# Altium PCB 拼版-max7219-tm1638-MOS板mp3.PcbDoc (part 2 of 2)
Units mil, origin at the board's own origin, x right, y up, seen from the top; angles counter-clockwise.
Board outline 3937.01 x 3937.01 mil, 2 copper layers (Top Layer, Bottom Layer); 103 components, 91 nets, 367 pads, 134 vias.
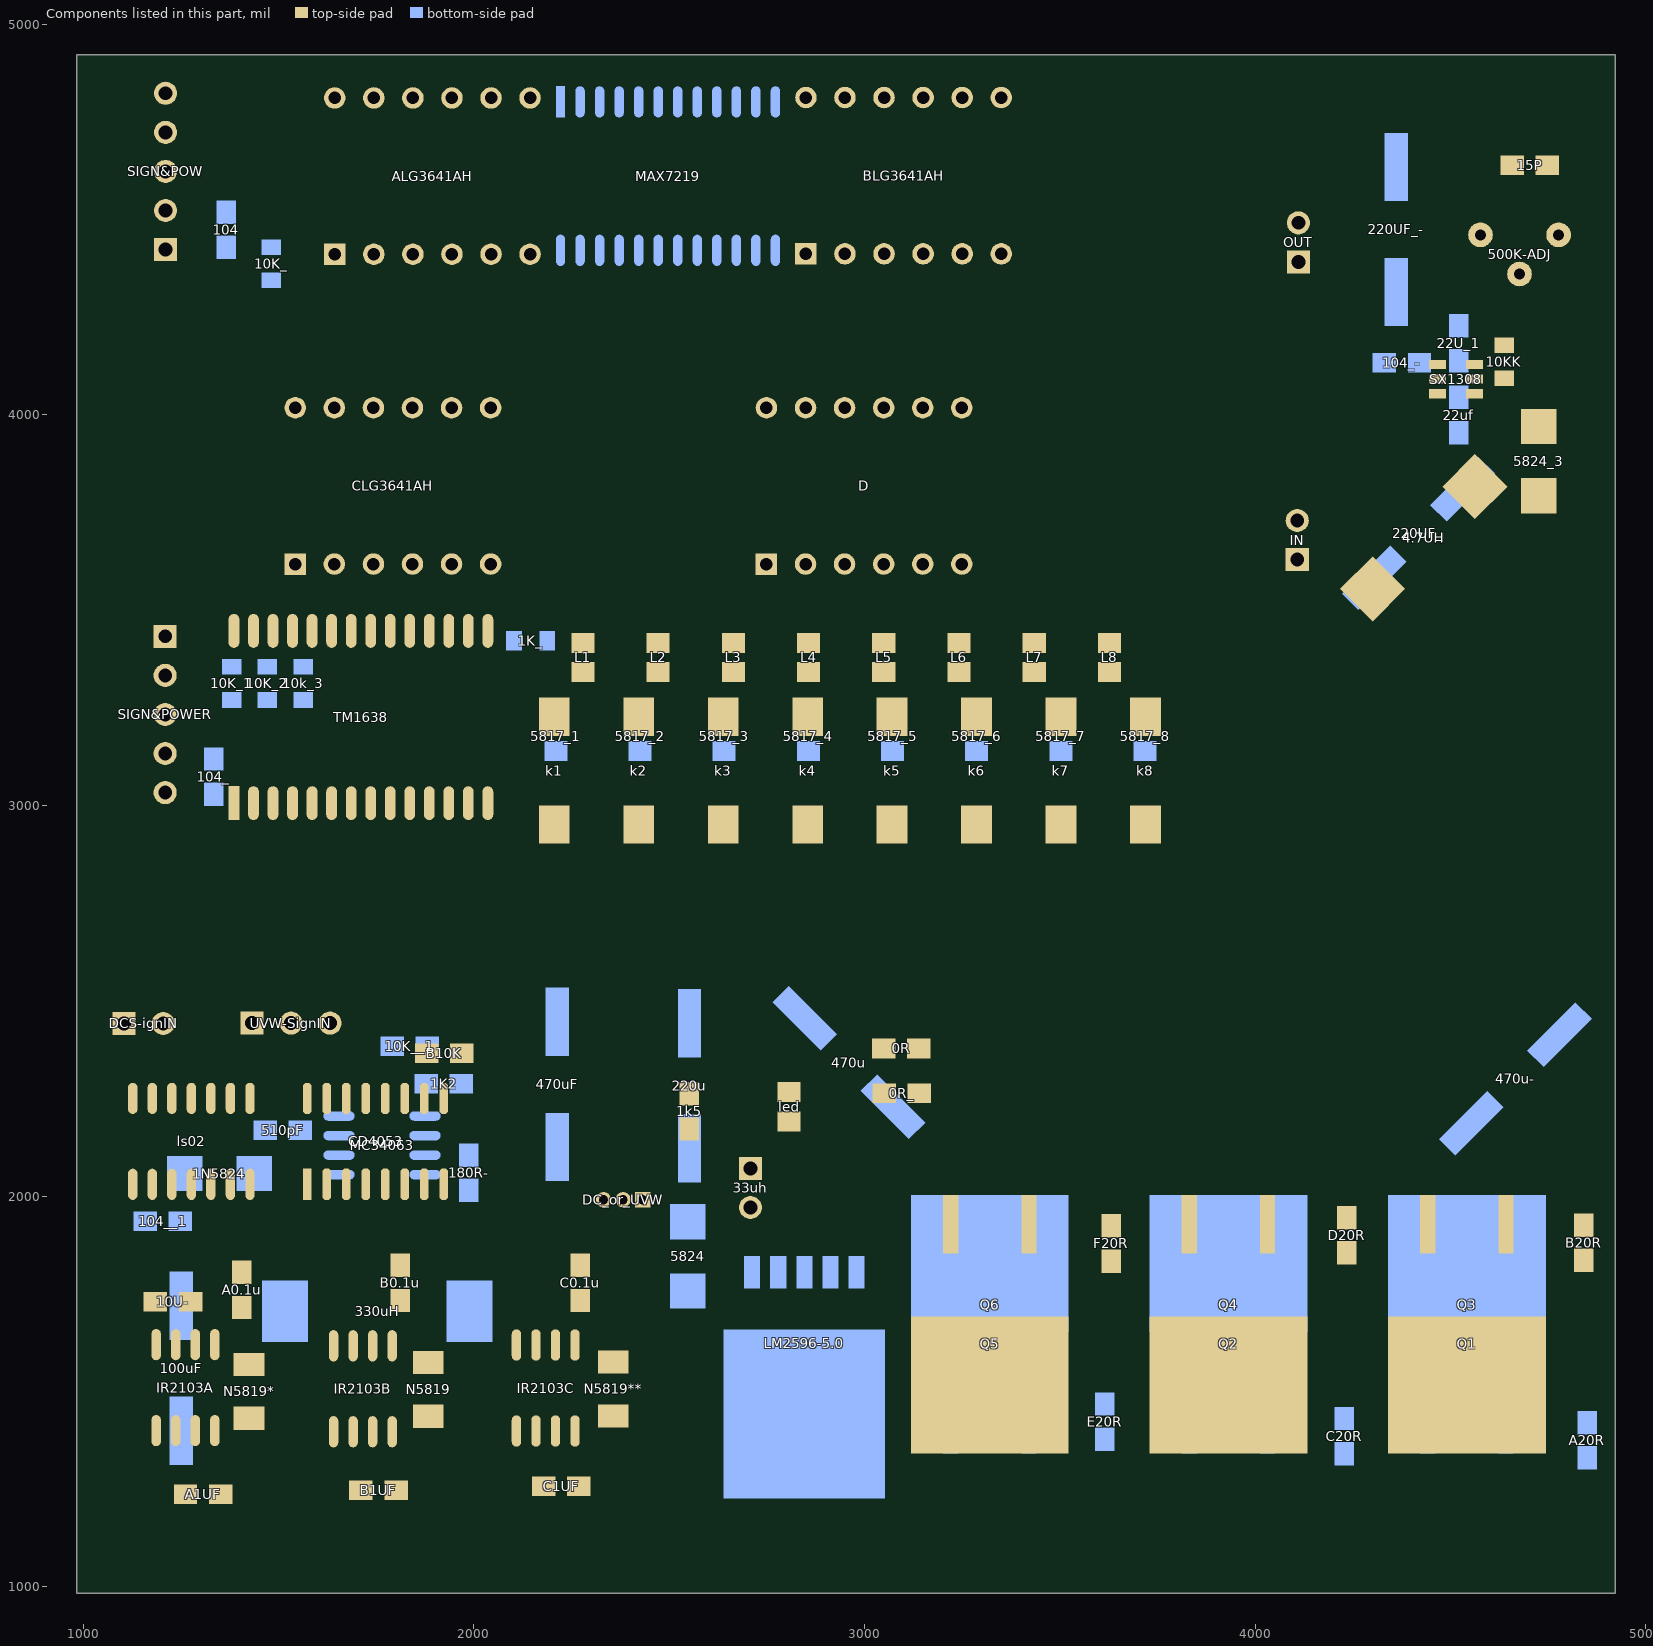
[diagram p2: the components of this part, seen from the top]

## Via types
v1: diameter 39.37, hole 31.5, Top Layer to Bottom Layer, 89 vias
v2: diameter 15, hole 13, Top Layer to Bottom Layer, 45 vias

## Nets (pads, with @x,y where several pads share a name; then routed paths per layer and width w, separated by ;. In a path a pad name is that pad's centre, name@x,y a point inside that pad or via, vN(x,y) a via of type N, cw(c..) or ccw(c..) an arc to the next point about the centre after c; other vN are vias at no path point) (continued)
copper on no net: | length 161819.9
  Top Layer w11.81: 2552,2262 2802.6,2262 ; 2565.5,2248.5 cw(c2598.1,2215.9) 2598.1,2262 cw(c2598.1,2308.1) 2565.5,2275.5 ; 2744.91,2262 ccw(c2744.91,2324.55) 2789.14,2280.32 ; 2766.17,2262 cw(c2766.17,2229.51) 2789.14,2252.48 ; 2773.43,2262 ccw(c2773.43,2296.04) 2797.5,2271.97
  Top Layer w12: 1210,3033 1329,2914 1490,2914 1536,2960 1536,3006 1536,3200 1596.5,3260.5 1896.5,3260.5 2036,3400 2036,3446.95 ; 1210,3133 1357,3280 1496,3280 1536,3320 1536,3382.88 ; 1210,3233 1295,3318 1444,3318 1486,3360 1486,3446.95 ; 1210,3333 1253,3376 1412,3376 1436,3400 1436,3446.95 ; 1210,3433 1291,3433 1304.95,3446.95 1386,3446.95 ; 1486,3006 1486,3060 1470,3076 1179,3076 1167,3064 1167,2960 1235,2892 2205.31,2892 2206,2892.69 2206,2951.41 2422.14,2951.41 2638.29,2951.41 2854.43,2951.41 3070.57,2951.41 3286.71,2951.41 3502.86,2951.41 3719,2951.41 ; 1536,3446.95 1536,3382.88 ; v2(1568,3392) 1569.36,3390.64 1599,3390.64 1612,3403.64 1612,3410 1619,3417 1636,3417 1636,3446.95 1636,3498 1702.46,3564.46 1757.46,3564.46 1783.5,3590.5 1783.5,3704.46 1843,3763.96 1843,4018 ; 1586,3006 1586,2960 1635,2911 2079,2911 2153.63,2985.63 2153.63,3013.62 2239,3013.62 2280,3054.62 v2(2280,3139.6) ; 1586,3446.95 1586,3975 1543,4018 1631,4106 2170,4106 2236,4040 2236,3377 2271.4,3341.6 2279,3341.6 ; 1636,3006 1636,3183 1679,3226 1911,3226 1928,3243 v2(2000,3243) ; v2(1656.64,3398) 1664,3390.64 1759.64,3390.64 1786,3417 1786,3446.95 ; 1686,3006 1686,3160 1732,3206 v2(1948,3206) ; 1686,3446.95 1686,3494 1708.33,3516.33 1740.22,3516.33 1802.5,3578.61 1802.5,3667.11 1943,3807.61 1943,4018 ; 1736,3006 1736,2945 1751,2930 2059.87,2930 2110.21,2980.34 2110.21,3004.43 2259,3153.21 2259,3283 2215,3327 v2(2215,3517.13) ; 1736,3446.95 1736,3497 1761,3497 1795,3531 1839,3531 1883.5,3575.5 1883.5,3682 1946.5,3745 2051,3745 2076,3720 2076,3681.41 2043,3648.41 2043,3618 ; 1743,3618 1743,3936 1789,3982 1789,4028.5 1819,4058.5 1965.5,4058.5 1993,4031 1993,3889 2107.5,3774.5 v2(2107.5,3658.5) ; 1743,4018 1802.5,4077.5 2041.5,4077.5 2148,3971 2148,3511 2111,3474 2111,3451.2 2139.73,3422.47 2139.73,3100.14 2091.21,3051.62 2091.21,2988.21 2052.69,2949.69 1846.31,2949.69 1836,2960 1836,3006 ; 1744,4411 1875,4542 2545,4542 2740.5,4346.5 2884.5,4346.5 2950,4412 ; 1786,3006 v2(1786,3132) ; 1836,3446.95 1836,3491 1902.5,3557.5 1902.5,3641 v2(1922.5,3661) ; 1844,4411 1891,4458 2585,4458 2716,4327 2965,4327 3050,4412 ; 1886,3006 1886,3094 2063,3271 2063,3540.72 2002.5,3601.22 2002.5,3634.78 2056.59,3688.86 2056.59,3700 2038.67,3717.92 1962,3717.92 1943,3698.92 1943,3618 ; 1886,3446.95 1886,3400 1837.5,3351.5 1567.38,3351.5 1536,3382.88 ; 1936,3006 1936,3070 2086.99,3220.99 v2(2086.99,3656.99) ; 1936,3446.95 1936,3498 v2(1963,3498) ; 1986,3006 1986,3071 v2(2103,3188) ; 1986,3446.95 1986,3556 1983.5,3558.5 1983.5,3651.5 v2(2029,3697) ; 2043,4018 2129,3932 2129,3523 v2(2114.25,3508.25) ; v2(2044,4301) 2044,4411 ; 2044,4811 2078,4811 2119,4770 2475,4770 v2(2497.12,4747.88) ; v2(2083,4672) 2488,4672 2525,4709 2525,4776 2568,4819 2629,4819 2660,4850 v2(2660,4861) ; v2(2132,3461) 2192,3521 v2(2192,4048) ; 2144,4411 2144,4331 2088,4275 1799,4275 1703,4371 1703,4550 1901,4748 v2(2457,4748) ; 2144,4811 2218.94,4885.94 3276.06,4885.94 3350,4812 ; v2(2161,3168) 2206,3168 2206,3227 ; 2279,3416.4 v2(2409.6,3416.4) 2471.57,3416.4 2471.57,3412.42 2533.1,3412.42 2537.08,3416.4 2664.14,3416.4 2814,3416.4 ; v2(2369,3015) 2369,3320 2390.6,3341.6 2471.57,3341.6 ; v2(2415,3287) 2422.14,3279.86 2422.14,3227 ; v2(2472,3457) 2849,3834 2849,4018 ; v2(2572,4749.41) 2589.59,4767 2865,4767 2908,4810 2908,4841 2919.5,4852.5 3068.5,4852.5 3091,4830 3091,4671 3350,4412 ; v2(2585,3061) 2585,3320 2606.6,3341.6 2664.14,3341.6 ; v2(2615,4583) v2(2767,4735) ; 2638.29,3227 2679,3227 2689,3217 v2(2689,3214.4) ; 2749,4018 2789.5,4058.5 2879,4058.5 2896,4041.5 2896,4012 2999,3909 2999,3547.82 3091.82,3455 3091.82,3354.41 3079,3341.6 3049.29,3341.6 ; v2(2761,4367) 2775,4381 2775,4637 2950,4812 ; v2(2799,4458) 2799,4561 3050,4812 ; 2854.43,3227 2854.43,3237 2924,3237 v2(2950,3263) ; 2856.71,3341.6 2889,3341.6 2902,3354.6 v2(2902,3556.5) ; 2856.71,3416.4 2814,3416.4 ; v2(3049,3772) 3049,4018 3199,3868 3199,3351.6 3209,3341.6 3241.86,3341.6 ; 3049.29,3416.4 3012.4,3416.4 2999,3403 ; 3070.57,3227 3070.57,3237 v2(3179,3237) ; 3149,4018 3689,3478 3689,3315 3677,3303 3539,3303 3500.4,3341.6 3434.43,3341.6 ; 3241.86,3416.4 3285,3416.4 ; v2(3243,3167) 3286.71,3210.71 3286.71,3227 ; 3249,3618 3522.13,3618 3670,3470.13 3670,3352.6 3659,3341.6 3627,3341.6 ; v2(3502.57,3287) 3502.86,3286.72 3502.86,3227 ; 3627,3416.4 3434.43,3416.4 3285,3416.4 ; v2(3718,3287) 3719,3286 3719,3227 ; 2814,3416.4 2814,3303 2899,3303 2999,3403 ; 2999,3403 2999,3317 3019,3297 3272,3297 3285,3310 3285,3416.4
  Top Layer w15: v1@1072.82,2313 cw(c1043.4,2313) 1064.2,2292.2 cw(c1085,2271.4) v1@1085,2300.82 ; v1(1085,2313) 1059,2287 1059,2184 1177,2066 1177,2030.32 ; 1089.42,2426.42 cw(c1051.82,2388.82) 1105,2388.82 cw(c1158.18,2388.82) 1120.58,2426.42 ; 1105,2442 1105,2375 1131,2349 1199,2349 1227,2321 1227,2250.32 1227,2199 1242,2184 1386,2184 1410,2160 1410,2120 1391,2101 1356,2101 1327,2072 1327,2030.32 ; 1127,2030.32 1127,1985 1173,1939 v1(1343,1939) ; 1131.5,2002.32 ccw(c1184.19,2002.32) 1146.93,1965.07 ; 1163.89,2079.11 cw(c1143.1,2058.32) 1172.5,2058.32 ; 1177,2250.32 1177,2180 1214,2143 v1(1357,2143) ; 1205,2419.97 cw(c1205,2366.79) 1242.6,2404.4 cw(c1280.21,2442) 1227.03,2442 ; 1205,2442 1277,2370 1277,2250.32 ; 1227,2030.32 1277,2030.32 ; 1331.5,2058.32 cw(c1375.38,2058.32) 1344.35,2089.35 ; v1@1334.38,1930.38 ccw(c1313.58,1909.58) 1313.58,1939 ccw(c1313.58,1968.42) v1@1334.38,1947.62 ; v1@1348.38,2134.38 ccw(c1327.58,2113.58) 1327.58,2143 ccw(c1327.58,2172.42) v1@1348.38,2151.62 ; 1416.42,2427.42 cw(c1378.82,2389.82) 1432,2389.82 cw(c1485.18,2389.82) 1447.58,2427.42 ; 1432,2443 1432,2372 1459,2345 1639,2345 1671,2377 1751,2377 1773.43,2354.57 1773.43,2315.57 1773.43,2250.32 ; 1532,2443 1586,2497 1681,2497 1735,2443 2038,2443 v1(2084,2397) ; 1532,2465.03 ccw(c1532,2518.21) 1569.6,2480.6 ccw(c1607.21,2443) 1554.03,2443 ; 1623.43,2030.32 1623.43,2091.43 1673,2141 2007,2141 v1(2041,2175) ; 1723.43,2250.32 1723.43,2316.43 v1(1732,2325) ; 1723.43,2274.88 cw(c1782.12,2274.88) v1@1740.62,2316.38 ; 1873.43,2250.32 1873.43,2207.57 1903,2178 1983,2178 2031,2226 2212,2226 2382,2056 2382,1991
  Top Layer w19.68: v1(1149,1287) 1187,1325 1187,1400 ; v1@1149,1296.84 ccw(c1149,1320.6) 1165.8,1303.8 ccw(c1182.6,1287) v1@1158.84,1287 ; 1237,1620 1237,1581 ; 1239.16,1592 ccw(c1270.92,1592) 1248.46,1569.54 ; 1276.95,1572.95 ccw(c1257.91,1592) 1284.84,1592 ; 1287,1400 1287,1349 1319,1317 1484,1317 1696,1105 v1(2511,1105) ; 1287,1620 1287,1583 1268,1564 1254,1564 1237,1581 ; 1338.24,1429.77 ccw(c1347.82,1443.43) 1359.63,1431.63 ; 1341,1413 1359.63,1431.63 ; 1396.3,1431.63 cw(c1396.3,1402.3) v1@1417.04,1423.04 ; 1400.85,1417.71 ccw(c1367.25,1384.11) 1367.25,1431.63 ccw(c1367.25,1479.15) 1400.85,1445.55 ; 1404.17,1431.63 ccw(c1404.17,1449.83) v1@1417.04,1436.96 ; v1@1424.61,1431.63 1359.63,1431.63 ; v1(1486,2384) 1573,2384 1632,2443 1632,2427 ; v1@1492.96,2377.04 cw(c1509.76,2360.24) 1509.76,2384 cw(c1509.76,2407.76) v1@1492.96,2390.96 ; 1497,2220.41 cw(c1527.59,2220.41) v1@1505.96,2242.04 ; v1@1497,2249 1497,2174.75 1474,2151.75 1474,2049.25 1497,2026.25 1497,1952 1424,1879 1218,1879 1099,1760 1099,1585 1146,1538 1212,1538 1237,1563 1237,1581 ; v1@1564,1557.16 cw(c1564,1533.4) 1580.8,1550.2 cw(c1597.6,1567) v1@1573.84,1567 ; v1(1564,1567) 1604,1527 1652,1527 1691,1566 ; 1612.32,2443 cw(c1564.79,2443) 1598.4,2409.4 cw(c1632,2375.79) 1632,2423.32 ; 1623.43,2250.32 1623.43,2190.43 1609,2176 1552,2176 1509,2133 1509,2066 1539,2036 1539,1918 v1(1679,1778) ; 1641,1397 1641,1451 1711,1521 1977,1521 2023,1475 2023,1250 2079,1194 2389,1194 v1(2428,1233) ; v1@1665.04,2289.04 cw(c1644.8,2268.8) 1673.43,2268.8 ; v1@1669.16,1778 ccw(c1645.4,1778) 1662.2,1794.8 ccw(c1679,1811.6) v1@1679,1787.84 ; 1673.43,2250.32 v1@1673.43,2284.57 ; 1673.43,2275.68 cw(c1692.32,2275.68) v1@1678.96,2289.04 ; 1691,1617 1691,1566 ; 1741,1397 1741,1349 1766,1324 1864,1324 2036,1152 2565,1152 2627,1090 v1(2978,1090) ; 1741,1617 1741,1561 1733,1553 1700,1553 1691,1562 1691,1566 ; 1743.16,1369 ccw(c1796.65,1369) 1758.83,1331.17 ; 1789,1395 1791,1397 1791,1412 1815.63,1436.63 ; 1791.1,1427.15 ccw(c1792.67,1459.59) 1815.63,1436.63 ; 1823.43,2250.32 1873.43,2250.32 1873.43,2360.43 1879,2366 ; 1859.85,1422.71 ccw(c1826.25,1389.11) 1826.25,1436.63 ccw(c1826.25,1484.15) 1859.85,1450.55 ; 1863.28,2355.28 cw(c1838.79,2330.79) 1873.43,2330.79 ; 1873.43,2328.02 cw(c1911.98,2328.02) 1884.72,2355.28 ; v1@1876.65,1429.67 ccw(c1859.85,1412.87) 1859.85,1436.63 ccw(c1859.85,1460.39) v1@1876.65,1443.59 ; v1(1883.61,1436.63) 1815.63,1436.63 ; v1@2010,1545.16 cw(c2010,1521.4) 2026.8,1538.2 cw(c2043.6,1555) v1@2019.84,1555 ; v1(2010,1555) 2047,1518 2116,1518 2159,1561 ; 2109,1399 2109,1445 2184,1520 2428,1520 2614,1706 2864,1706 2945,1787 3584,1787 3631,1834 ; 2111.16,1427 cw(c2159.82,1427) 2125.41,1461.41 ; 2159,1258 2159,1399 2159,1434 2215.32,1490.32 2419.68,1490.32 2441,1469 2441,1388 2464,1365 3169.71,1365 3321,1516.29 ; 2159,1283.28 ccw(c2199.28,1283.28) 2170.8,1254.8 ; 2159,1330.81 ccw(c2246.81,1330.81) 2184.72,1268.72 ; 2159,1619 2159,1561 ; 2161.16,1427 cw(c2183.27,1427) 2167.63,1442.63 ; 2209,1399 2209,1347 2233,1323 2471,1323 2650,1144 v1(2982,1144) ; 2209,1619 2209,1566 2200,1557 2163,1557 2159,1561 ; 2256.21,1409.7 ccw(c2256.61,1412.2) 2258.41,1410.41 ; 2258,1410 2285.63,1437.63 ; 2259.34,1429.13 ccw(c2264.18,1459.08) 2285.63,1437.63 ; 2332.85,1423.71 ccw(c2299.25,1390.11) 2299.25,1437.63 ccw(c2299.25,1485.15) 2332.85,1451.55 ; v1@2349.65,1430.67 ccw(c2332.85,1413.87) 2332.85,1437.63 ccw(c2332.85,1461.39) v1@2349.65,1444.59 ; v1(2356.61,1437.63) 2285.63,1437.63 ; v1@2418.16,1233 cw(c2394.4,1233) 2411.2,1216.2 cw(c2428,1199.4) v1@2428,1223.16 ; v1@2493.04,1416.96 ccw(c2476.24,1433.76) 2500,1433.76 ccw(c2523.76,1433.76) v1@2506.96,1416.96 ; v1(2500,1410) 2500,1508 2647,1655 2894,1655 2995,1756 4146,1756 4234,1844 4234,1855 ; v1@2504.04,1098.04 ccw(c2487.24,1081.24) 2487.24,1105 ccw(c2487.24,1128.76) v1@2504.04,1111.96 ; v1@2971.04,1083.04 ccw(c2954.24,1066.24) 2954.24,1090 ccw(c2954.24,1113.76) v1@2971.04,1096.96 ; v1@2975.04,1137.04 ccw(c2958.24,1120.24) 2958.24,1144 ccw(c2958.24,1167.76) v1@2975.04,1150.96 ; 3005.21,1365 ccw(c3005.21,1805.5) 3316.7,1494.02 ; 3052.74,1365 ccw(c3052.74,1757.98) 3330.62,1480.1 ; 3100.26,1365 ccw(c3100.26,1710.46) 3344.53,1466.18 ; 3112.74,1379.01 ccw(c3089.02,1453.2) v1@3158.25,1417.51 ; 3127.28,1429.81 ccw(c3097.72,1484.9) v1@3157.58,1466.84 ; 3128.12,1449.65 cw(c3152.14,1408.19) v1@3164.47,1454.49 ; 3133.68,1472.99 cw(c3152.45,1442.53) v1@3172.52,1472.15 ; 3143.32,1403.25 ccw(c3134.01,1427.92) v1@3158.03,1417.05 ; 3146.76,1404.55 cw(c3154.23,1384.75) v1@3162.95,1404.03 ; 3147.78,1365 ccw(c3147.78,1662.93) 3358.45,1452.26 ; 3148.63,1421.75 cw(c3160.11,1395.77) v1@3170.66,1422.14 ; v1@3157.18,1463.38 cw(c3201.6,1466.19) 3174.93,1501.83 ; v1@3157.43,1415.29 cw(c3185.88,1408.49) 3170.56,1433.41 ; 3158,1393.48 ccw(c3148.76,1422.4) v1@3175.75,1408.49 ; v1@3158.66,1446.23 cw(c3197.34,1386.75) v1@3218.12,1454.59 ; v1@3163.87,1403.67 ccw(c3173.43,1432.19) 3187.2,1405.45 ; v1@3164.68,1411.96 cw(c3184.86,1371.71) v1@3214.52,1405.59 ; v1@3168.58,1473.72 ccw(c3178.47,1534.71) 3214.61,1484.58 ; v1@3169.52,1422.51 ccw(c3176.24,1447.93) 3189.46,1425.2 ; v1@3170.13,1422.33 ccw(c3194.09,1493.89) v1@3228.66,1426.8 ; v1@3171.81,1414.37 ccw(c3128.71,1488.33) v1@3211.48,1466.51 ; v1@3176.51,1410.48 cw(c3197.04,1405.05) 3186.37,1423.4 ; v1@3176.57,1410.71 cw(c3251.25,1392.89) v1@3211.05,1458.3 ; v1@3176.76,1462.7 cw(c3223.01,1456.56) 3194.65,1493.61 ; v1@3176.82,1464.62 cw(c3245.01,1468.95) 3204.06,1523.64 ; v1@3179.12,1402.79 cw(c3199.53,1357) v1@3217.48,1403.81 ; 3180.06,1388.39 ccw(c3161.27,1441.51) v1@3212.12,1417.24 ; 3190.86,1425.09 cw(c3205.69,1395.51) v1@3227.48,1420.41 ; 3194.01,1469.21 cw(c3213.44,1439.32) v1@3223.88,1473.41 ; 3196.79,1443.22 cw(c3222.23,1419.14) v1@3221.27,1454.16 ; 3196.91,1379.9 ccw(c3178.69,1433.99) v1@3229.82,1408.63 ; 3198.58,1393.87 cw(c3221,1371.45) v1@3221,1403.16 ; 3199.6,1451.58 cw(c3212.57,1430.05) v1@3218.63,1454.45 ; 3201.27,1452.59 ccw(c3189.72,1471.76) v1@3211.45,1466.37 ; v1@3211.16,1413.26 cw(c3257.08,1412.06) v1@3231.49,1450.21 ; v1@3211.2,1464.91 cw(c3253.05,1461.02) 3226.21,1493.37 ; 3212.87,1438.3 ccw(c3193.7,1471.2) v1@3230.52,1461.49 ; v1@3214.7,1405.44 ccw(c3236.54,1431.65) 3252.94,1401.73 ; v1@3219.52,1454.27 ccw(c3225.02,1490.43) 3247.7,1461.74 ; v1@3221.86,1473.8 ccw(c3223.85,1496.44) 3238.45,1479.03 ; v1@3222.48,1473.73 ccw(c3234.32,1551.71) 3283.24,1489.84 ; v1@3223.33,1422.56 ccw(c3236,1474.53) 3263.79,1428.82 ; v1@3227.3,1420.56 ccw(c3256.42,1455.5) 3278.28,1415.62 ; v1@3230.68,1411.22 cw(c3277.53,1402.62) 3250.49,1441.83 ; v1@3230.8,1463.09 cw(c3319.97,1454.8) 3262.78,1523.71 ; v1@3230.8,1463.14 cw(c3255.51,1460.97) 3239.57,1479.97 ; v1@3230.84,1413 cw(c3262.55,1413) 3240.13,1435.42 ; 3414.04,1989.98 cw(c3452.71,1951.32) 3452.71,2006 ; 3421,1927.71 3421,1984 3443,2006 3566,2006 3631,1941 3631,1924 ; 3421,1992.87 ccw(c3421,2014.27) 3436.14,1999.14 ; 3427.96,1976.06 cw(c3500.23,1903.79) 3500.23,2006 ; 3430.84,1983.02 cw(c3456.96,1983.02) 3438.49,2001.49 ; 3596.59,1799.59 cw(c3631,1765.18) 3631,1813.84 ; 3596.64,1975.36 cw(c3550.28,1929) 3615.84,1929 ; 3608.66,1811.66 ccw(c3591.32,1829) 3615.84,1829 ; 4024.54,1989.98 cw(c4053.55,1960.97) 4053.55,2002 ; 4031.5,1927.71 4031.5,1979.5 4054,2002 ; 4031.61,1992.87 ccw(c4031.94,2024.05) 4054,2002 ; 4038.46,1976.06 cw(c4101.08,1913.45) 4101.08,2002 ; 4199.59,1979.41 ccw(c4234,2013.82) 4234,1965.16 ; 4203.88,1813.88 ccw(c4167.76,1850) 4218.84,1850 ; 4211.66,1967.34 cw(c4194.32,1950) 4218.84,1950 ; v1(4214,1537) 4222,1529 4261,1529 4288,1556 4288,1694 4317,1723 4833,1723 ; 4218.37,1828.37 cw(c4234,1812.73) 4234,1834.84 ; v1@4220.96,1543.96 ccw(c4257.08,1580.08) 4257.08,1529 ; 4234,1945 4177,2002 4054,2002 ; 4642,1927.71 4642,1980 4674,2012 4755,2012 4841,1926 ; 4642,1992.87 ccw(c4642,2023.93) 4663.96,2001.96 ; 4788.02,1723 ccw(c4788.02,1797.98) 4841.04,1744.96 ccw(c4824.24,1761.76) 4848,1761.76 ccw(c4871.76,1761.76) v1@4854.96,1744.96 ; 4806.59,1960.41 ccw(c4841,1994.82) 4841,1946.16 ; 4818.66,1948.34 cw(c4801.32,1931) 4825.84,1931 ; 4830.28,1820.28 cw(c4787.51,1777.51) 4848,1777.51 ; v1@4838.19,1737.18 cw(c4820.32,1735.68) 4833,1723 ; 4841,1836 4848,1829 v1(4848,1738) 4833,1723 ; v1@4847.18,1728.19 ccw(c4845.68,1710.32) 4833,1723
  Top Layer w20: 1237,1273.21 ccw(c1293.21,1273.21) 1253.46,1233.46 ; 1237,1321.5 ccw(c1341.5,1321.5) 1267.61,1247.61 ; 1262,1237 1237,1262 1237,1400 1237,1462 1268,1493 1482,1493 1549,1426 v1(1549,1411) ; v1(1335,2368) 1390,2368 1453,2305 1561,2305 1573.43,2292.57 v1(1573.43,2250.32) ; v1@1341.85,2361.15 cw(c1358.38,2344.62) 1358.38,2368 cw(c1358.38,2391.38) v1@1341.85,2374.85 ; 1521.86,1453.14 cw(c1479.72,1411) v1@1539.32,1411 ; 1562.35,2303.65 cw(c1538.02,2279.32) 1572.43,2279.32 ; v1@1566.58,2091.73 cw(c1550.04,2075.19) 1573.43,2075.19 cw(c1596.81,2075.19) v1@1580.27,2091.73 ; v1@1566.58,2257.17 ccw(c1550.04,2273.7) 1573.43,2273.7 ccw(c1596.81,2273.7) v1@1580.27,2257.17 ; 1573.43,2030.32 v1(1573.43,2098.57) ; 1691,1247 1691,1397 1691,1444 1738.16,1491.16 1944.84,1491.16 1967,1469 v1(1967,1331) ; 1691,1271.14 ccw(c1730.14,1271.14) 1702.46,1243.46 ; 1691,1319.43 ccw(c1778.43,1319.43) 1716.61,1257.61 ; 1693,1425 cw(c1743.7,1425) 1707.85,1460.85 ; v1@1960.15,1337.85 ccw(c1943.62,1354.38) 1967,1354.38 ccw(c1990.38,1354.38) v1@1973.85,1337.85 ; 1978,2357 1969,2366 2010,2366 v1(2069,2307) ; v1(2566,1493) 2688,1615 2945,1615 3046,1716 3701,1716 ; v1@2566,1502.69 ccw(c2566,1526.07) 2582.53,1509.53 ccw(c2599.07,1493) v1@2575.68,1493 ; 3725.01,1691.99 ccw(c3825.6,1792.59) 3864.86,1655.85 ; 3725.89,1691.11 cw(c3622.64,1587.86) 3764.18,1551.97 ; 3744.79,1556.89 ccw(c3582.94,1597.92) 3701.01,1715.99 ; 3749.01,1667.99 ccw(c3836.31,1755.29) 3870.38,1636.63 ; 3750.77,1666.23 cw(c3662.34,1577.79) 3783.57,1547.06 ; 3773.01,1643.99 ccw(c3847.01,1718) 3875.9,1617.4 ; 3775.65,1641.35 cw(c3702.04,1567.73) 3802.95,1542.14 ; 3859.34,1675.07 cw(c3814.89,1829.88) 3701.01,1715.99 ; 3931.5,1516.29 3900.71,1516.29 3701,1716
  Top Layer w30: v1(4489.6,3920.4) 4489.6,3922.4 4520.6,3953.4 4520.6,3972.4 4505.6,3987.4 4438.6,3987.4 4411.6,4014.4 4411.6,4081.4 4421.6,4091.4 ; 4560.85,4053.99 4560.85,4002.15 4725.6,3837.4 4725.6,3792.81 ; 4560.85,4130.4 4589.6,4130.4 4637.6,4178.4 4637.6,4321.4 4676.6,4360.4 ; v2@4562.85,4093.4 4637.6,4093.4 ; 4657.6,4638.4 4657.6,4541.4 4576.6,4460.4 4684.6,4460.4 4754.6,4390.4 4754.6,3998.98 v1(4725.6,3969.98) ; 4421.6,4091.4 4459.01,4128.8 4466.36,4128.8 4466.36,4091.4 4421.6,4091.4
  Top Layer w50: 4562.42,3816.21 4585.82,3792.81 4725.6,3792.81
  Top Layer w59.06: v1@1276.8,1726.8 ccw(c1314.94,1764.94) 1314.94,1711 ; v1(1280,1711) v1@1406,1711 ; 1377.69,1651.69 ccw(c1319.38,1710) v1@1401.84,1710 ; 1392.52,1666.52 ccw(c1349.03,1710) v1@1410.53,1710 ; v1@1406,1715 v1@1406,1711 ; 1414.77,1569.43 cw(c1399.66,1633.66) 1353,1587 ; 1424.61,1569.43 1370.57,1569.43 1353,1587 ; 1781.89,1711 ccw(c1781.89,1758.11) 1815.2,1724.8 ; 1830.76,1592.24 ccw(c1873.77,1635.26) 1873.77,1574.43 ; 1883.61,1574.43 1848.57,1574.43 1804,1619 1812,1627 1812,1733 ; 2286.69,1600.31 ccw(c2346.77,1660.4) 2346.77,1575.43 ; 2356.61,1575.43 2311.57,1575.43 2273,1614 2273,1733 1812,1733 ; v1@2700.16,1783 cw(c2794.69,1783) 2727.85,1849.85 ; v1@2701.17,1778.65 cw(c2742.84,1799.16) v1(2710,1832) ; v1(2710,1783) v1(2710,1832) ; v1(2988,2078) v1(2955,2045) 2805,1895 2773,1895 v1(2710,1832) ; 1353,1587 1353,1627 1406,1680 v1@1406,1711 ; v1@1406,1711 1790,1711 1812,1733
  Bottom Layer w11.81: 1544,2176 1565,2155 1655,2155 ; 1557.8,2165.8 ccw(c1583.87,2191.87) 1583.87,2155 ; 1566.15,2174.15 ccw(c1612.38,2220.38) 1612.38,2155 ; 1574.5,2182.5 ccw(c1640.9,2248.9) 1640.9,2155 ; 1622.69,2150.69 ccw(c1612.29,2140.29) 1612.29,2155 ccw(c1612.29,2169.71) 1622.69,2159.31 ; 1859.5,2290.5 ccw(c1822.07,2327.93) 1875,2327.93 ; 1860,2269 cw(c1848.09,2244.52) 1873.21,2234.02 ; 1862.5,2370.5 cw(c1832.32,2340.32) 1875,2340.32 ; 1870.69,2209.31 ccw(c1860.29,2219.71) 1875,2219.71 ccw(c1889.71,2219.71) 1879.31,2209.31 ; 1875,2055 1947,2055 ; 1875,2205 1875,2378 1881,2384 ; 1875,2235.73 cw(c1914.27,2235.73) 1886.5,2263.5 ; 1875,2318.27 ccw(c1914.27,2318.27) 1886.5,2290.5 ; 1875,2335.49 cw(c1924.51,2335.49) 1889.5,2370.5 ; 1907.31,2050.69 cw(c1917.71,2040.29) 1917.71,2055 cw(c1917.71,2069.71) 1907.31,2059.31 ; 1957.94,2044.06 cw(c1933.88,2020) 1967.91,2020 ; 1966.57,2035.43 ccw(c1986.25,2055.11) 1986.84,2027.28 ; 1986.59,2039.09 cw(c1985.44,2093.43) 1947,2055 ; 1987,2015 1947,2055
  Bottom Layer w12: 1210,3033 1270,3033 1273.97,3029.03 1334,3029.03 1361.03,3029.03 1372,3040 1372,3270 1380,3270 1471.5,3270 1563,3270 ; 1210,3133 1265,3133 1278.97,3119.03 1334,3119.03 ; 1210,3233 1167,3276 1167,3476 1442,3476 1518,3400 1518,3366 1529,3355 1563,3355 ; 1210,3333 1287,3333 1302,3318 1407,3318 1444,3355 1471.5,3355 ; 1210,3433 1288,3355 1380,3355 ; 1211,4423 1295,4429 1366,4429 1482,4429 1511.5,4429 1608,4332.5 1984.5,4332.5 1993,4341 2448,4341 2472,4365 2472,4421 ; 1211,4523 1293,4519 1366,4519 1683,4519 1699.5,4535.5 2855,4535.5 3090.5,4771 3090.5,4830 3068,4852.5 2798.5,4852.5 2797,4854 2758,4854 2747,4843 2747,4760 2716,4729 2628,4729 ; 1211,4623 1168,4580 1168,4368 1270.5,4265.5 3232.5,4265.5 3300,4333 3300,4430 3277,4453 3232.5,4453 3209.5,4430 3209.5,4375 3187,4352.5 2947,4352.5 2890.5,4409 2890.5,4452.5 2845.5,4452.5 2819.5,4478.5 2788,4478.5 2772,4462.5 2772,4421 ; 1211,4723 1328,4723 1468,4583 v2(2615,4583) ; 1211,4823 1264,4770 1674,4770 1694,4790 1694,4830 1735,4871 2189,4871 2222,4838 2222,4801 ; 1482,4344 1569,4344 1600,4313 2003.5,4313 2012.5,4322 2494,4322 2522,4350 2522,4421 ; v2(1568,3392) 1568,3388 1601,3388 1601,3080 1666,3015 v2(2369,3015) ; 1643,3618 1731,3530 2202.13,3530 ; 1643,4018 1643,4060.5 1679,4096.5 1941.5,4096.5 2002.5,4035.5 2002.5,4000 2025,3977.5 2647.5,3977.5 2728.5,4058.5 2808.5,4058.5 2849,4018 ; 1644,4411 1726,4493 2349,4493 2372,4470 2372,4421 2372,4380 2384,4368 2435,4368 2447,4380 2447,4463 2458,4474 2583,4474 2597,4460 2597,4379 2649,4327 2808,4327 2840,4359 2840,4402 2850,4412 ; 1644,4811 1723,4890 2236,4890 2272,4854 2272,4801 ; v2(1656.64,3398) 1502.5,3552.14 1502.5,3659 1702.5,3859 1702.5,4042 1719,4058.5 1763.5,4058.5 1802,4020 1802,4000 1844,3958 2671,3958 2701,3988 2749,3988 2749,4018 ; 1743,4018 1824.5,3936.5 2867.5,3936.5 2949,4018 3086,3881 3190,3881 3780,3291 3780,3089 3759,3068 3319,3068 3287.14,3099.86 3287.14,3139.6 ; 1744,4411 1803.5,4351.5 1965.5,4351.5 1974,4360 2262,4360 2272,4370 2272,4421 ; 1744,4811 1785,4852 2163,4852 2185,4830 2185,4750 2285.5,4649.5 2787.5,4649.5 2950,4812 ; v2(1786,3132) 1888.51,3234.51 ; 1844,4411 1907,4474 2296,4474 2322,4448 2322,4421 ; 1844,4811 2024.5,4630.5 2868.5,4630.5 3050,4812 ; v2(1922.5,3661) 2033.5,3772 v2(3049,3772) ; 1943,3618 2001.5,3676.5 2049.5,3676.5 2069.5,3696.5 3099,3696.5 3149,3646.5 3149,3618 3205,3562 3472,3562 3761,3273 3761,3108 3749,3096 3519,3096 3502.57,3112.43 3502.57,3139.6 ; 1943,4018 1883.5,4077.5 1699,4077.5 1683.5,4062 1683.5,3890 1483.5,3690 1483.5,3506.7 1580.68,3409.52 1609,3409.52 1620,3398.52 1620,3240 1799,3061 v2(2585,3061) ; 1944,4411 1903.5,4370.5 1818,4370.5 1803,4385.5 1803,4430 1781,4452 1725,4452 1703,4430 1703,4390 1683,4370 1603,4370 1603,4449 1648,4494 1685,4494 1703,4512 2380,4512 2422,4470 ; 1944,4811 v2(2083,4672) ; v2(1948,3206) 1948,3263.5 1719,3492.5 1686.5,3492.5 1602,3577 1602,3641.5 1619,3658.5 1802.5,3658.5 1843,3618 1911.77,3549.23 2848.39,3549.23 2863.61,3534 2965,3534 3028.63,3597.63 ; v2(1963,3498) 2000,3461 v2(2132,3461) ; v2(2000,3243) 2083,3160 2115,3160 2132,3177 2132,3226 2159,3253 2254.6,3253 ; v2(2029,3697) 2049,3717 3150,3717 3249,3618 ; 2043,3618 2668,3618 2708.5,3658.5 2789.5,3658.5 2789.5,3618.5 2839,3569 2889.5,3569 v2(2902,3556.5) ; 2043,4018 2121.5,4096.5 3170.5,4096.5 3249,4018 ; v2(2044,4301) 2528,4301 2574.93,4347.94 ; v2(2086.99,3656.99) 2107.5,3677.5 2126.5,3677.5 ; v2(2103,3188) 2103,3422 ; v2(2107.5,3658.5) 2126.5,3677.5 ; v2(2114.25,3508.25) 2152.5,3470 2152.5,3355.1 2254.6,3253 ; v2(2161,3168) 2161,3200 2175.4,3214.4 2210,3214.4 ; 2188,3422 2188,3416.4 v2(2409.6,3416.4) ; v2(2192,4048) 2691.13,4048 2720.63,4077.5 3089.5,4077.5 3149,4018 ; 2210,3139.6 v2(2280,3139.6) 2301.4,3139.6 2321,3120 2363.91,3120 2382.9,3101.01 2467.96,3101.01 2472,3105.05 v2(2472,3457) ; v2(2215,3517.13) 2202.13,3530 ; 2322,4801 2322,4710 2363.5,4668.5 2732.61,4668.5 2788,4723.89 2788,4750 2850,4812 ; 2372,4801 2372,4750 2434.5,4687.5 2568,4687.5 2628,4729 ; v2(2415,3287) 2415,3214.4 2425.43,3214.4 ; 2422,4421 2422,4470 ; 2422,4801 2422,4857.47 2456.53,4892 3170,4892 3250,4812 ; 2425.43,3139.6 2368,3139.6 2254.6,3253 ; v2(2457,4748) 2485,4720 2511,4720 2522,4731 2522,4801 ; 2472,4801 2472,4773 v2(2497.12,4747.88) ; v2(2572,4749.41) 2572,4801 ; 2622,4421 2622,4471.5 2648,4497.5 2838.5,4497.5 2864.5,4471.5 3049.5,4471.5 3091,4430 3091,4408.5 3128,4371.5 3168,4371.5 3190.5,4394 3190.5,4612 3350,4771.5 3350,4812 ; 2640.86,3139.6 2688.6,3139.6 3028.63,3479.63 3028.63,3597.63 ; 2640.86,3214.4 v2(2689,3214.4) ; v2(2660,4861) 2647,4848 2647,4759 2658,4748 2708,4748 2722,4762 2722,4801 ; 2672,4421 2672,4393 2718.5,4346.5 2792.5,4346.5 2799,4353 v2(2799,4458) ; 2672,4801 2672,4818 2727,4873 2816,4873 2817.5,4871.5 3088,4871.5 3109.5,4850 3109.5,4812 3150,4812 ; 2722,4421 2722,4393 2748,4367 v2(2761,4367) ; 2749,3618 2706.22,3575.22 1917.78,3575.22 1893,3600 1893,3640 1855.5,3677.5 1602.5,3677.5 1543,3618 1543,3580.01 1888.51,3234.51 ; v2(2767,4735) 2767,4765 2772,4770 2772,4801 ; 2849,3618 2889.22,3618 2932.22,3575 2969,3575 3008.5,3614.5 3008.5,3639 3028,3658.5 3079,3658.5 3089.5,3648 3089.5,3339.5 2889.6,3139.6 2856.29,3139.6 2721.98,3139.6 2683.39,3101.01 2598.33,3101.01 2598.33,3371.66 2439.99,3530 2202.13,3530 ; 2856.29,3214.4 2856.29,3240.29 2879,3263 v2(2950,3263) ; 3049,3618 3028.63,3597.63 ; 3071.71,3139.6 3071.71,3113.71 3040.01,3082.01 2041.01,3082.01 1888.51,3234.51 ; 3071.71,3214.4 3115.4,3214.4 3138,3237 v2(3179,3237) ; 3150,4412 3045.5,4516.5 2468.5,4516.5 2422,4470 ; v2(3243,3167) 3244,3168 3244,3214.4 3287.14,3214.4 ; 3250,4412 3250,4370.28 3187.72,4308 2614.87,4308 2574.93,4347.94 ; 3502.57,3214.4 v2(3502.57,3287) ; 3718,3139.6 3620.4,3139.6 3546,3214 3546,3360 3491,3415 3173.5,3415 3108.5,3480 3108.5,3660 3091,3677.5 3008.5,3677.5 2949,3618 2889.5,3677.5 2126.5,3677.5 ; 3718,3214.4 v2(3718,3287) ; 2574.93,4347.94 2572,4421 2572,4350.87 2574.93,4347.94 ; 2628,4729 2622,4801 2622,4735 2628,4729
  Bottom Layer w15: v1(1085,2313) 1205,2433 1205,2442 ; v1@1085,2325.18 ccw(c1085,2354.6) 1105.8,2333.8 ccw(c1126.6,2313) v1@1097.18,2313 ; 1161.03,2389.03 ccw(c1108.07,2442) 1182.97,2442 ; 1182.76,2410.76 cw(c1205,2388.52) 1205,2419.97 ; 1186.64,2414.64 ccw(c1159.28,2442) 1197.97,2442 ; v1@1334.38,1947.62 ccw(c1267.71,2014.29) 1362,2014.29 ; v1(1343,1939) 1362,1958 1362,2073 1319,2116 1319,2171 1435,2287 1509,2287 1557,2335 1722,2335 v1(1732,2325) ; v1@1344.99,1937.01 ccw(c1303.93,1978.07) 1362,1978.07 ; v1@1355.01,2141.01 ccw(c1393.66,2179.66) 1393.66,2125 ; v1(1357,2143) 1375,2125 1526,2125 ; v1@1365.62,2151.62 ccw(c1429.87,2215.87) 1429.87,2125 ; 1546.49,2104.51 ccw(c1568.61,2126.63) v1@1573.9,2095.8 ; 1552.43,2098.57 1526,2125 ; v1@1571.36,2110.58 cw(c1562.6,2161.6) 1526,2125 ; 1678.44,2335 cw(c1678.44,2271.44) v1@1723.38,2316.38 ; 1714.65,2335 cw(c1714.65,2307.65) v1@1733.99,2326.99 ; v1(2041,2175) 2120,2254 2120,2365 v1@2088,2397 ; 4031.5,1416.09 4031.5,1471.5 4063,1503 4166,1503 4228,1441 4228,1431 ; 4031.5,1483.59 ccw(c4031.5,1512.79) 4052.15,1492.15 ; 4043.69,1471.41 cw(c4073.32,1471.41) 4052.37,1492.37 ; 4194.59,1474.41 cw(c4156.18,1436) 4210.5,1436 ; 4206.66,1462.34 ccw(c4228,1483.68) 4228,1453.5
  Bottom Layer w19.68: v1@1142.04,1280.04 cw(c1125.24,1263.24) 1149,1263.24 cw(c1172.76,1263.24) v1@1155.96,1280.04 ; v1(1149,1287) 1149,1218 1211,1156 2876,1156 2912,1192 3295,1192 3366,1263 3366,1498 3451,1583 4168,1583 v1(4214,1537) ; v1(1350,1234) 1424,1308 v1(1424,1430) ; v1@1350,1243.84 ccw(c1350,1267.6) 1366.8,1250.8 ccw(c1383.6,1234) v1@1359.84,1234 ; v1@1417.04,1423.04 cw(c1400.24,1406.24) 1424,1406.24 cw(c1447.76,1406.24) v1@1430.96,1423.04 ; 1459.82,2385 cw(c1459.82,2357.82) v1@1479.04,2377.04 ; 1464.65,2385 ccw(c1464.65,2405.35) v1@1479.04,2390.96 ; v1@1486,2385 1414,2385 1086,2057 1086,1895 1178,1803 1178,1618 1277,1519 1677,1519 1713,1555 v1(2010,1555) ; v1(1564,1567) 1679,1682 v1(1679,1778) ; v1@1564,1576.84 ccw(c1564,1600.6) 1580.8,1583.8 ccw(c1597.6,1567) v1@1573.84,1567 ; 1632,2426 1632,2443 ; v1@1672.04,1771.04 cw(c1655.24,1754.24) 1679,1754.24 cw(c1702.76,1754.24) v1@1685.96,1771.04 ; v1(1801,1247) 1883.61,1329.61 v1(1883.61,1436.63) ; v1@1801,1256.84 ccw(c1801,1280.6) 1817.8,1263.8 ccw(c1834.6,1247) v1@1810.84,1247 ; v1@1876.65,1429.67 cw(c1859.85,1412.87) 1883.61,1412.87 cw(c1907.38,1412.87) v1@1890.57,1429.67 ; v1@2003.04,1548.04 ccw(c1986.24,1531.24) 1986.24,1555 ccw(c1986.24,1578.76) v1@2003.04,1561.96 ; v1(2275,1252) 2356.61,1333.61 v1(2356.61,1437.63) ; v1@2275,1261.84 ccw(c2275,1285.6) 2291.8,1268.8 ccw(c2308.6,1252) v1@2284.84,1252 ; v1@2349.65,1430.67 cw(c2332.85,1413.87) 2356.61,1413.87 cw(c2380.38,1413.87) v1@2363.57,1430.67 ; v1(2428,1233) 2500,1305 v1(2500,1410) ; v1@2428,1242.84 ccw(c2428,1266.6) 2444.8,1249.8 ccw(c2461.6,1233) v1@2437.84,1233 ; v1@2493.04,1403.04 cw(c2476.24,1386.24) 2500,1386.24 cw(c2523.76,1386.24) v1@2506.96,1403.04 ; v1(2511,1105) 2863,1105 2930,1038 4614,1038 4850,1274 4850,1330 ; v1@2517.96,1098.04 cw(c2534.76,1081.24) 2534.76,1105 cw(c2534.76,1128.76) v1@2517.96,1111.96 ; v1(2978,1090) 4053,1090 4226,1263 4226,1339 4228,1341 ; v1(2982,1144) 3381,1144 3615,1378 ; v1@2984.96,1083.04 cw(c3001.76,1066.24) 3001.76,1090 cw(c3001.76,1113.76) v1@2984.96,1096.96 ; v1@2988.96,1137.04 cw(c3005.76,1120.24) 3005.76,1144 cw(c3005.76,1167.76) v1@2988.96,1150.96 ; 3421,1416.09 3421,1473 3478,1530 3553,1530 3615,1468 ; 3421,1481.25 ccw(c3421,1501.17) 3435.09,1487.09 ; 3430.84,1471.41 cw(c3458.44,1471.41) 3438.93,1490.93 ; 3580.59,1343.59 cw(c3615,1309.18) 3615,1357.84 ; 3580.59,1502.41 ccw(c3615,1536.82) 3615,1488.16 ; 3592.66,1355.66 ccw(c3575.32,1373) 3599.84,1373 ; 3592.66,1490.34 cw(c3575.32,1473) 3599.84,1473 ; v1@4204.16,1537 ccw(c4180.4,1537) 4197.2,1553.8 ccw(c4214,1570.6) v1@4214,1546.84 ; 4217.28,1325.28 cw(c4196.23,1304.23) 4226,1304.23 ; 4226,1294.58 cw(c4269.42,1294.58) 4238.72,1325.28 ; 4839.28,1314.28 cw(c4813.41,1288.41) 4850,1288.41 cw(c4886.59,1288.41) 4860.72,1314.28
  Bottom Layer w20: v1(1127,2250.32) 1249.18,2372.5 v1@1330.5,2372.5 ; v1@1127,2260.01 ccw(c1127,2283.39) 1143.53,2266.86 ccw(c1160.07,2250.32) v1@1136.69,2250.32 ; 1300.75,2372.5 cw(c1300.75,2333.75) v1@1328.15,2361.15 ; v1(1499,2249) 1515.89,2249 1562.89,2296 v1(1672,2296) ; v1(1549,1411) 1680,1411 1771,1502 2078,1502 2119,1543 2468,1543 2636,1711 3056,1711 3086,1681 3086,1644 3108,1622 4242,1622 4385,1479 v1(4385,1454) ; v1@1555.85,1404.15 cw(c1572.38,1387.62) 1572.38,1411 cw(c1572.38,1434.38) v1@1555.85,1417.85 ; v1@1566.06,2092.29 ccw(c1552.43,2080.65) 1552.43,2098.57 ; v1@1566.06,2104.86 cw(c1552.43,2116.5) 1552.43,2098.57 ; v1(1573.43,2098.57) 1552.43,2098.57 ; v1(1573.43,2250.32) 1741.68,2250.32 1862,2130 ; v1@1580.27,2243.47 cw(c1596.81,2226.94) 1596.81,2250.32 cw(c1596.81,2273.7) v1@1580.27,2257.17 ; v1@1665.15,2289.15 ccw(c1648.62,2272.62) 1648.62,2296 ccw(c1648.62,2319.38) v1@1665.15,2302.85 ; 1826.51,2165.49 ccw(c1847,2185.97) 1847,2157 ; v1@1959.71,1323.71 ccw(c1987.97,1351.97) 1987.97,1312 ; v1(1967,1331) 1986,1312 2077,1312 2258,1493 v1(2566,1493) ; v1@1973.85,1337.85 ccw(c2036.25,1400.25) 2036.25,1312 ; 1983.46,2106.46 cw(c2018.39,2141.39) 1969,2141.39 v1(1969,2224) 1982,2237 2030,2237 2069,2276 v1(2069,2307) ; v1@2559.15,1486.15 ccw(c2542.62,1469.62) 2542.62,1493 ccw(c2542.62,1516.38) v1@2559.15,1499.85 ; 4350.79,1513.21 cw(c4291.58,1454) v1@4375.32,1454 ; v1@4378.15,1460.85 ccw(c4361.62,1477.38) 4385,1477.38 ccw(c4408.38,1477.38) v1@4391.85,1460.85 ; 4384.93,1479.07 cw(c4359.86,1454) v1@4395.31,1454
  Bottom Layer w30: 1239.01,2079.41 ccw(c1187.33,2131.09) 1260.42,2131.09 ccw(c1333.51,2131.09) 1281.83,2079.41 ; 1260.42,2058 1260.42,2174.42 1412,2326 1499,2326 1557,2384 1791,2384 ; 4642,1416.09 4642,1478 4672,1508 4762,1508 4850,1420 ; 4646.69,1471.41 cw(c4673.91,1471.41) 4654.66,1490.66 ; 4676.6,4360.4 4676.6,4567.4 v1(4747.6,4638.4) ; 4824.39,1445.61 ccw(c4850,1471.21) 4850,1435
  Bottom Layer w39.37: 1437.58,2058 1453.58,2042 1642,2042 ; 1455.68,2076.1 ccw(c1537.99,2158.41) 1537.99,2042 ; 1614.17,2042 ccw(c1614.17,2067.83) 1632.43,2049.57 ; 1642.17,2042 ccw(c1642.17,2067.83) 1660.43,2049.57
  Bottom Layer w50: 4107.6,3629.4 4210.6,3526.4 4250.6,3526.4 v1(4266.6,3542.4) 4365.6,3641.4 4365.6,3798.4 v1(4521.6,3954.4) ; 4110.6,4391.4 4283.6,4391.4 4360.6,4314.4 ; 4330.6,4133.4 4330.6,4284.4 4360.6,4314.4 ; v1(4757.6,3937.4) 4640.6,4054.4 4640.6,4184.4 4596.6,4228.4 4521.6,4228.4 4446.6,4228.4 4360.6,4314.4
  Bottom Layer w59.06: 1249,1762.08 ccw(c1331.08,1762.08) v1@1273.04,1704.04 ; 1249,1992.42 cw(c1326,1992.42) 1271.55,2046.86 ; 1260.42,2058 1249,2046.58 1249,1936 1249,1742 ; v1@1276.41,1701.83 cw(c1292.13,1742) 1249,1742 ; v1@1323,1711 v1(1280,1711) 1249,1742 ; 1440.58,2055 1516.78,1978.8 1516.78,1705 ; 1495.9,1745.56 ccw(c1445.49,1795.97) 1516.78,1795.97 ccw(c1588.07,1795.97) 1537.66,1745.56 ; 1867,2130 1962,2130 1987,2105 2192,2105 ; 1949.65,2130 cw(c1949.65,2072.65) 1990.2,2113.2 ; 1989.22,1705 2080,1795.78 2080,1993 2192,2105 ; 1989.22,1754.21 ccw(c1989.22,1873.02) 2073.23,1789.01 ; 2114.03,2027.03 cw(c2213,1928.07) 2213,2068.03 ; 2161.16,2105 ccw(c2161.16,2177.84) 2212.67,2126.33 ; v1@2545.04,2165.04 ccw(c2639.29,2259.29) 2639.29,2126 ; 2548,1934.58 2671.58,1934.58 2708,1971 ; v1@2552.22,2180.08 cw(c2574.17,2139.17) 2607,2172 ; 2555,2126 2653,2126 ; 2620.08,1934.58 ccw(c2620.08,2058.92) 2708,1971 ; 2779.07,1805.34 2779.07,1899.93 2708,1971 ; 2912.93,1805.34 2912.93,1928.07 2770,2071 2708,2071 2653,2126 ; v1(2955,2045) v1(2988,2078) 3095,2185 3117,2185 ; 3149,2250 3127.86,2228.86 3073.14,2228.86 3117,2185 ; 3196,2106 3117,2185 ; 2192,2105 2213,2126 2259,2172 v1(2552,2172) 2607,2172 ; 2607,2172 2653,2126 ; 2213.33,2183.83 ccw(c2241.9,2212.4) 2241.9,2172 cw(c2241.9,2212.4) 2213.33,2183.83
  other v1: 3780,1392 3829,1392 4387,1400 4442,1400 3167,1413 3221,1413 3780,1449 3829,1449 4441,1454 3167,1464 3221,1464 2109,1619 1336,1710 1392,1710 1608,1786 1063,1824 1162,1895 4743,2369 4779.14,2413.14 4316.6,3403.4 4586.6,3403.4 4112.6,3509.4 4764.6,3512.4 4304.47,3583.26 4339.6,3623.4 4881.6,3637.4 3981.6,3775.4 4881.6,3823.8 3981.6,3887.4 3981.6,3999.4 4694.6,3999.4 4881.6,4010.2 3981.6,4111.4 4881.6,4196.6 3981.6,4223.4 4881.6,4383 4881.6,4569.4 4027.6,4612.4 4111.6,4714.4 4304.6,4801.4 4547.6,4801.4
  other v2: 4515.6,4053.4 4515.6,4079.4 4560.85,4091.4 4515.6,4105.4 4515.6,4131.4

## Polygon pours and split planes (outlines as drawn)
no net on Top Layer "Top Layer-No Net" (solid, remove dead copper, pour order 12): 3938.79,3622 4190.79,3370 4673.79,3370 4703.79,3370 4881.79,3548 4903.79,3570 4903.79,4689 4895.79,4689 4738.79,4846 4737.79,4845 4232.79,4845 4165.79,4845 3940.79,4620
no net on Top Layer "Top Layer-No Net" (solid, remove dead copper, pour order 16): 3873,2700 970,2700 970,4118 970,4126 3873,4126
no net on Top Layer "Top Layer-No Net" (solid, remove dead copper, pour order 14): 952,4884 952,4228 3607,4228 3743,4228 3743,4932 3743,4925 951,4925
no net on Top Layer "Top Layer-No Net" (solid, remove dead copper, pour order 9): 1000.85,2564.47 1000.85,999.47 3099.85,999.47 3102.85,999.47 3102.85,2561.47
no net on Bottom Layer "Top Layer-No Net" (solid, remove dead copper, pour order 11): 3938.79,3622 4190.79,3370 4673.79,3370 4703.79,3370 4881.79,3548 4903.79,3570 4903.79,4689 4895.79,4689 4738.79,4846 4737.79,4845 4232.79,4845 4165.79,4845 3940.79,4620
no net on Bottom Layer "Top Layer-No Net" (solid, remove dead copper, pour order 15): 3873,2700 970,2700 970,4118 970,4126 3873,4126
no net on Bottom Layer "Top Layer-No Net" (solid, remove dead copper, pour order 13): 952,4884 952,4228 3607,4228 3743,4228 3743,4932 3743,4925 951,4925
no net on Bottom Layer "Top Layer-No Net" (solid, remove dead copper, pour order 10): 1000.85,2564.47 1000.85,999.47 3099.85,999.47 3102.85,999.47 3102.85,2561.47

## Keep-outs
Keep-Out Layer:
  lines w10: 3758,4920 3758,4184 3795,4147 3896,4147 3927,4178 3927,4630 4157,4860 4748,4860 4918,4690 4918,3562 4714,3358 4183,3358 3923,3618 3898,3618 3898,2700 3880,2682 2437,2682 2404,2649 2404,2605 2430,2579 4885,2579 4919,2545 4919,984.25 984.75,984.25 984,985 984,2577 1840,2577 1868,2605 1868,2654 1839,2683 1010,2683 984.25,2708.75 984.25,4123 1016,4154.75 1016,4184 984.25,4215.75 984.25,4921.26 3758,4921.26

## Other copper
Top Layer:
  rectangle: 4339,1057 4745,1424
  rectangle: 3727.5,1057 4133.5,1424
  rectangle: 3116,1057 3522,1424
  rectangle: 4329,1810 4534,2349
  rectangle: 3720,1810 3925,2349
  rectangle: 3111,1810 3316,2349
  rectangle: 3111,2056 4902,2428
Bottom Layer:
  rectangle: 4351,1295.09 4532,1556.09
  rectangle: 3740.5,1295.09 3921.5,1556.09
  rectangle: 3129,1306 3310,1567
  rectangle: 3124,1655 4741,2282

## Silkscreen, mask and mechanical layers (free items; w line width, h text height)
Top Overlay:
  text "SDA" at 1030,4800 h40
  text "CS" at 1069.99,4700 h40
  text "CLK" at 1030,4600 h40
  text "GND" at 1030,4500 h40
  text "VCC" at 1030,4400 h40
  text "STB" at 1032,3411 h40
  text "CLK" at 1032,3311.5 h40
  text "DIO" at 1038.66,3212 h40
  text "GND" at 1032,3112.5 h40
  text "DC5" at 1032,3013 h40
  text "---" at 4073,2353 h200
  text "W" at 3569,1088 h100
  text "V" at 4177.5,1088 h100
  text "U" at 4777,1088 h100
Bottom Overlay:
  text "+++" at 3828,2291 h200
Top Solder:
  rectangle: 4339,1057 4745,1424
  rectangle: 3727.5,1057 4133.5,1424
  rectangle: 3116,1057 3522,1424
  rectangle: 4329,1810 4534,2349
  rectangle: 3720,1810 3925,2349
  rectangle: 3111,1810 3316,2349
  rectangle: 3111,2056 4902,2428
Bottom Solder:
  rectangle: 4351,1295.09 4532,1556.09
  rectangle: 3740.5,1295.09 3921.5,1556.09
  rectangle: 3129,1306 3310,1567
  rectangle: 3124,1655 4741,2282